# Altium PCB drive.PcbDoc
Units mil, origin at the board's own origin, x right, y up, seen from the top; angles counter-clockwise.
Board outline 2180 x 2690 mil, 2 copper layers (Top Layer, Bottom Layer); 20 components, 12 nets, 60 pads, 2 vias.
Unrouted connection lines stored in the file: 10.
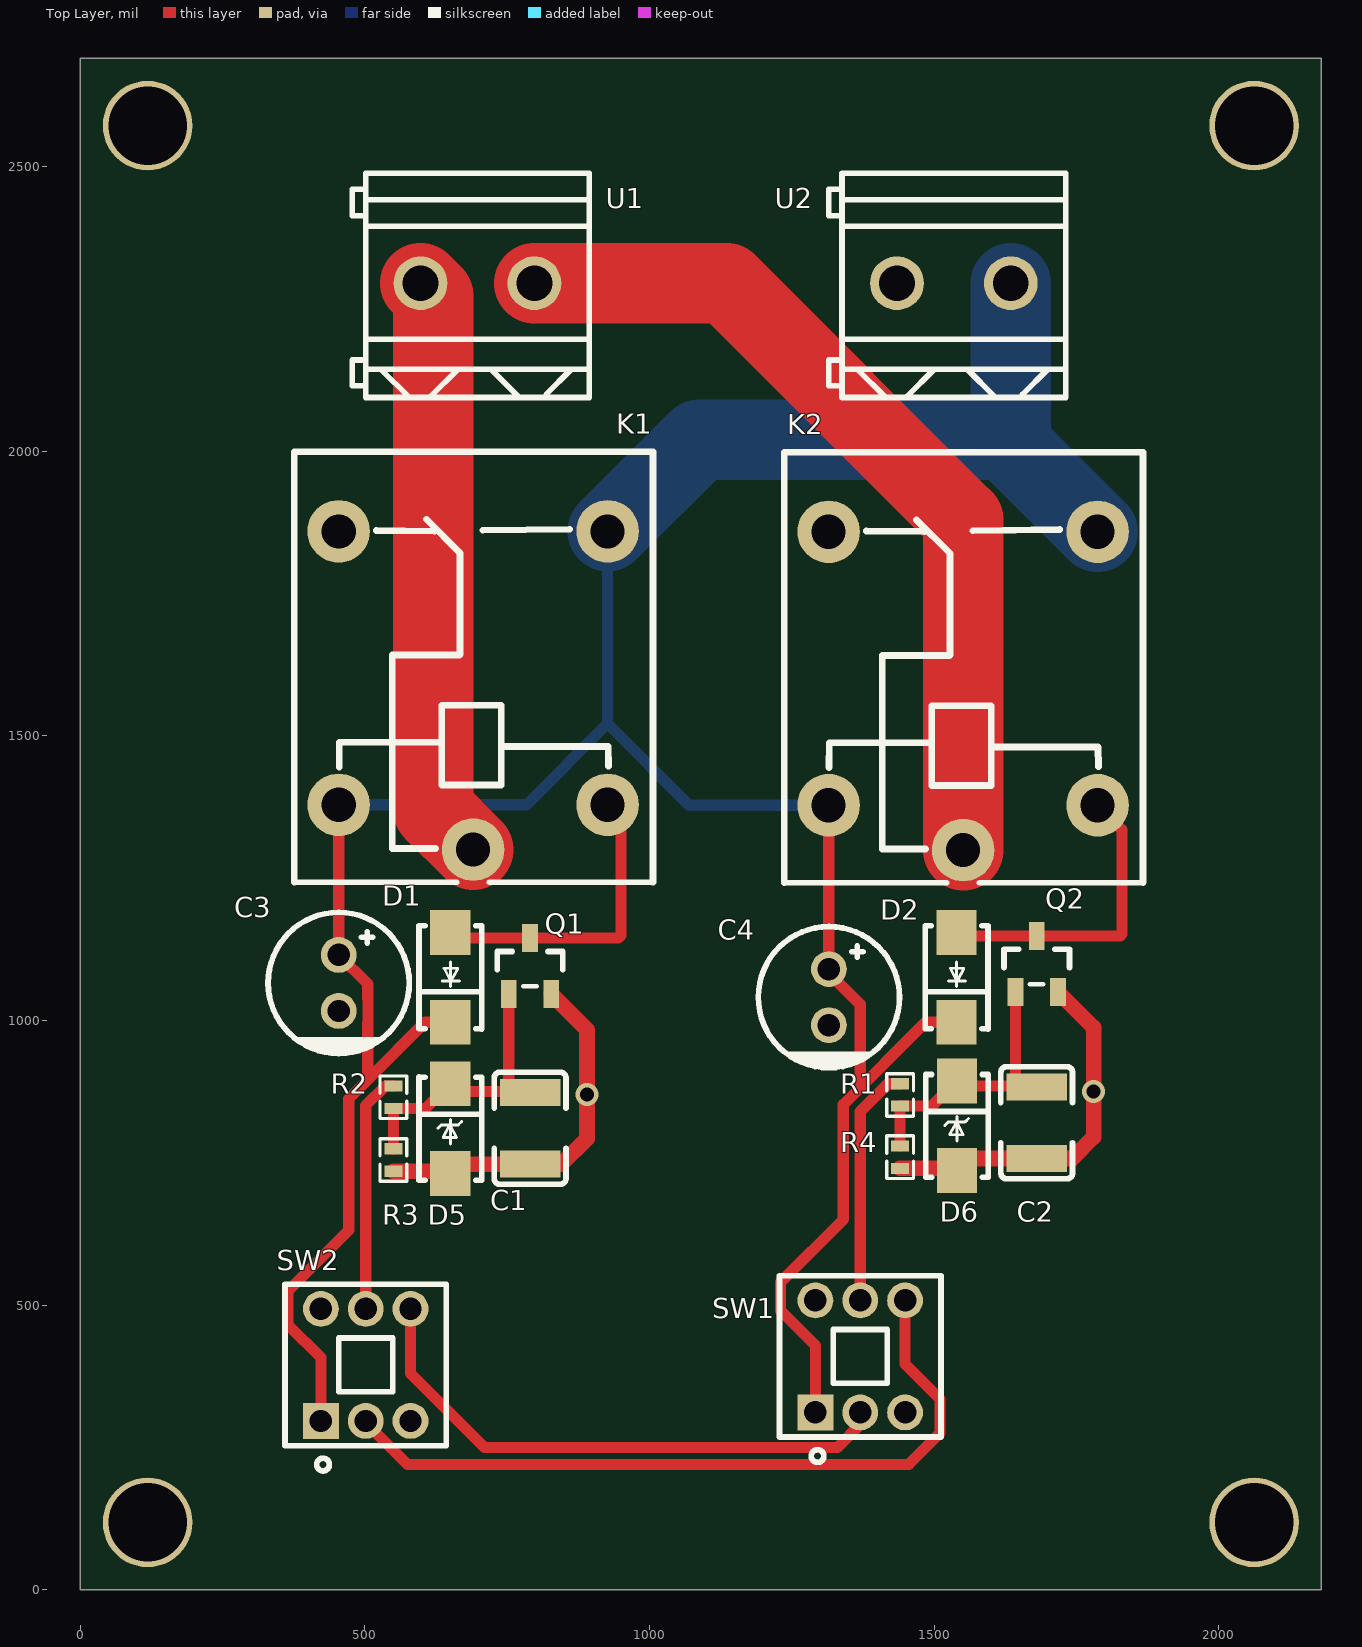
[diagram p0: Top Layer view]
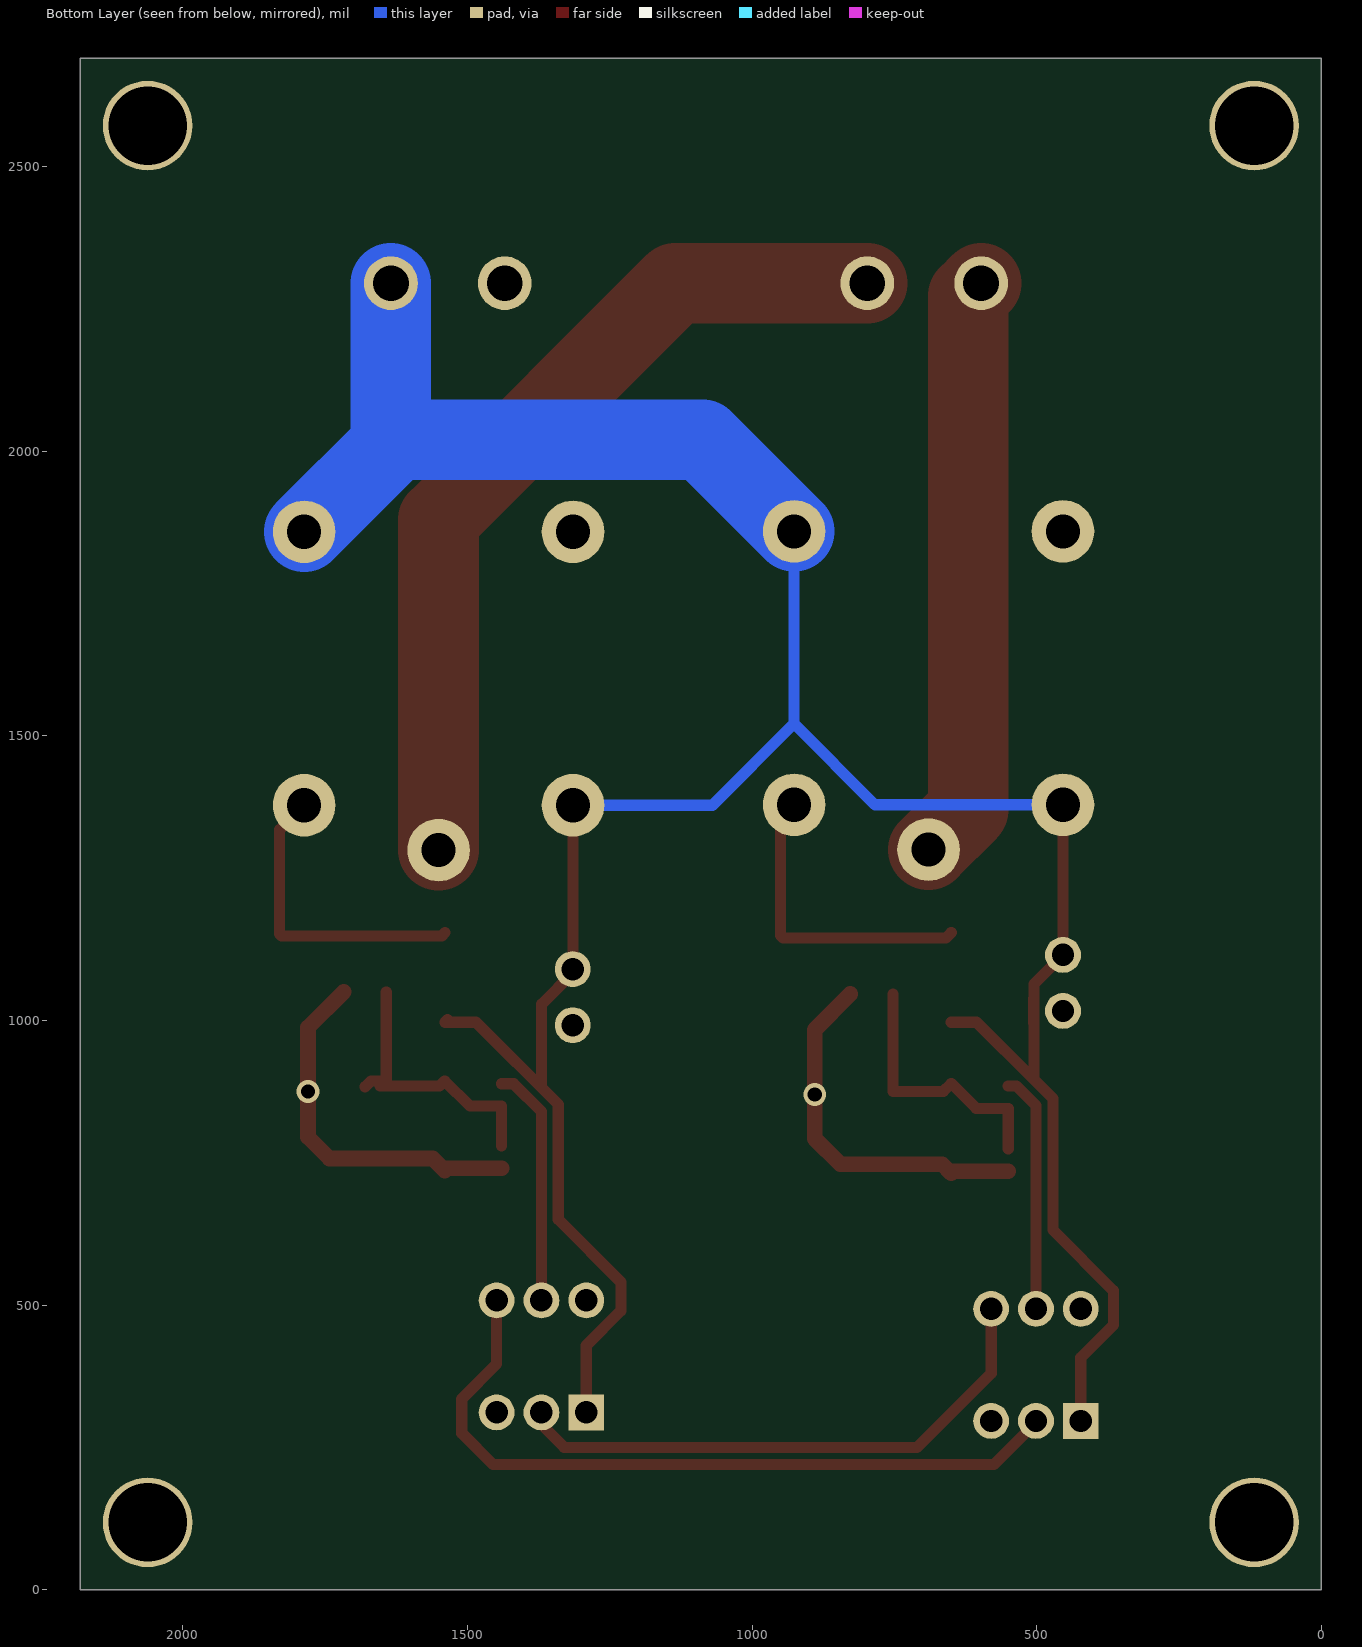
[diagram p1: Bottom Layer view, seen from below]
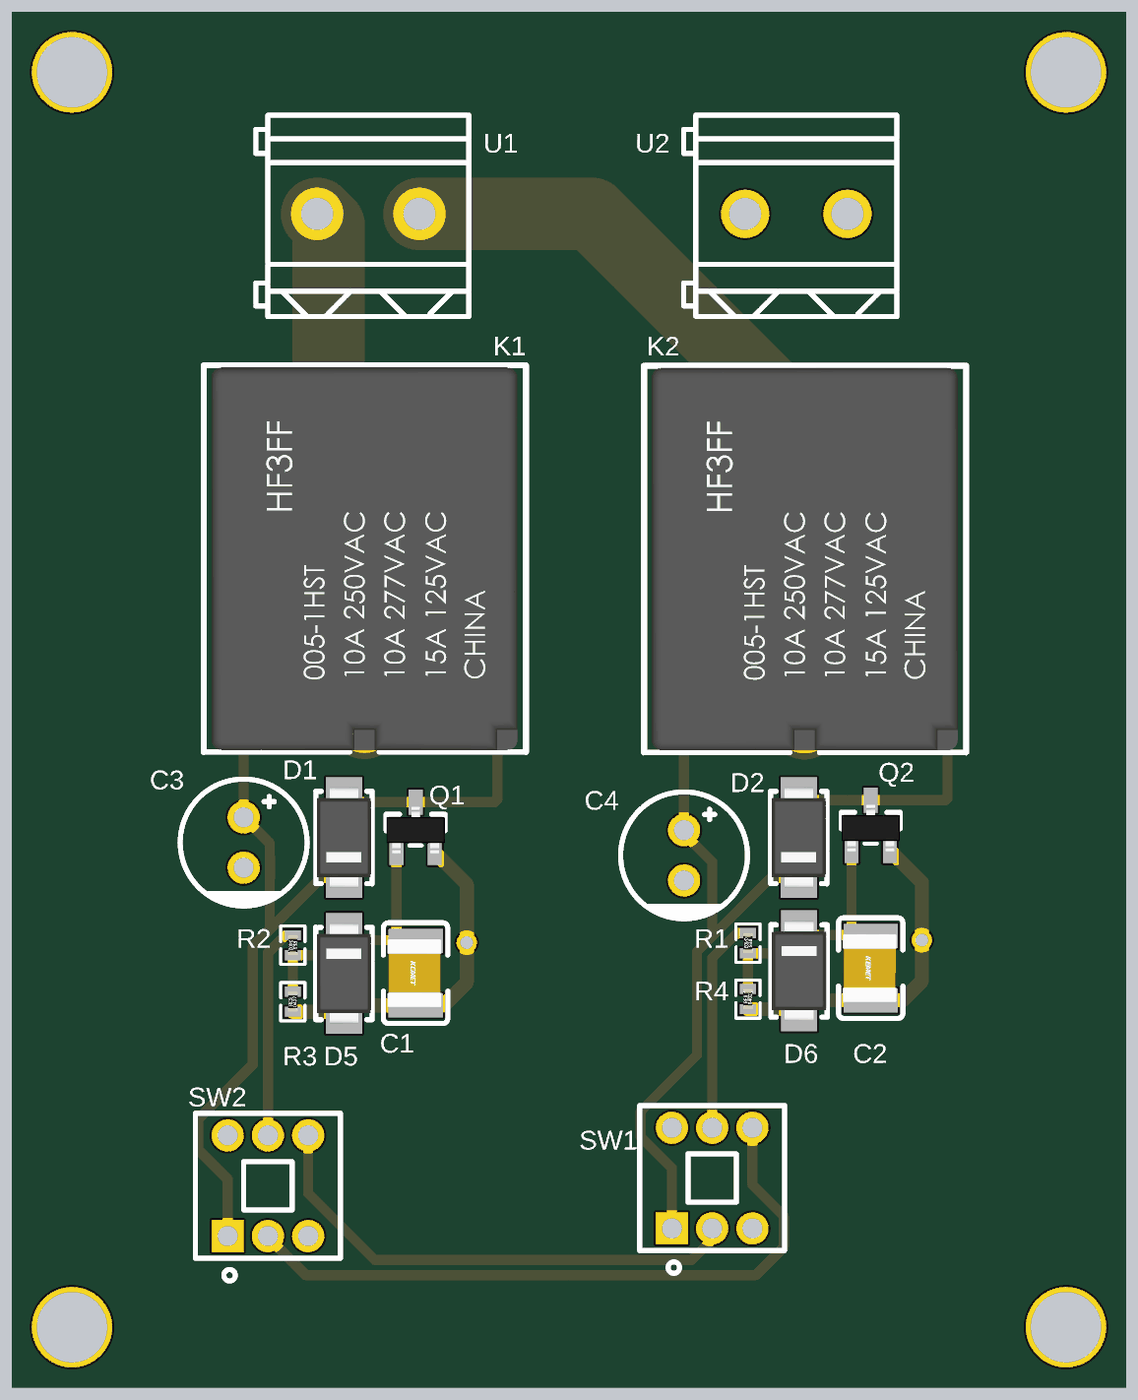
[diagram p2: 3D render of the assembled board from above, using the file's embedded part models]

## Layer stack, top to bottom
Top Solder: solder mask 0.4, Solder Resist, Dk 3.5
Top Layer: signal copper 1.4
Dielectric 1: dielectric 12.6, FR-4, Dk 4.8
Bottom Layer: signal copper 1.4
Bottom Solder: solder mask 0.4, Solder Resist, Dk 3.5

## Board outline
0,0 0,2690 2180,2690 2180,0
cut-out: -180,2270

## Design rules (kind name [scope] priority, off if disabled: settings)
Clearance [All] p1: gap=10 ignorepadtopadclearanceinfootprint=TRUE
HoleSize [All] p1: absolutevalues=TRUE maxlimit=393.7 minlimit=1 maxpercent=80.000 minpercent=20.000
MinimumSolderMaskSliver [All] p1: minsoldermaskwidth=6
PolygonConnect [All] p1: thpad.connectstyle=Direct thpad.reliefconductorwidth=10 thpad.reliefentries=4 thpad.polygonreliefangle="90 Angle" thpad.airgapwidth=10 smdpad.connectstyle=Relief smdpad.reliefconductorwidth=10 smdpad.reliefentries=4 smdpad.polygonreliefangle="90 Angle" smdpad.airgapwidth=10 via.connectstyle=Direct via.reliefconductorwidth=10 via.reliefentries=4 via.polygonreliefangle="90 Angle" via.airgapwidth=10
RoutingVias [All] p1: holewidth=28 width=50 viastyle="Through Hole" minholewidth=10 minwidth=10 maxholewidth=393.7 maxwidth=393.7
SilkToSilkClearance [All] p1: silktosilkclearance=6
SilkToSolderMaskClearance [IsPad] p1: minsilkscreentomaskgap=4 clearancetoexposedcopper=TRUE
SolderMaskExpansion [All] p1: expansion=4
Width VCC [InNet('RELAY1')] p1: maxlimit=400 minlimit=10 preferedwidth=19.68
Width GND [InNet('GND')] p2: maxlimit=400 minlimit=10 preferedwidth=27.56
Width [All] p3: maxlimit=400 minlimit=10 preferedwidth=19.68
26 further rules are at their usual default settings.

## Components (designator, comment, footprint, x,y, rotation, side; value= is the part's Value field where it differs from the comment)
C1 "10uf" C1210 790,810.5 r270 top
C2 "10uf" C1210 1680,820.26 r270 top
C3 "100uf 35v" "100uf 35v" 453.8,1065.79 r270 top
C4 "100uf 35v" "100uf 35v" 1315,1040.79 r270 top
D1 "1N4007" SMA_L4.4-W2.6-LS5.0-RD 650,1075.5 r90 top
D2 "1N4007" SMA_L4.4-W2.6-LS5.0-RD 1539.23,1075.5 r90 top
D5 "SMAJ30A-TP" SMAJ16A-TP 650,810 r270 top
D6 "SMAJ30A-TP" SMAJ16A-TP 1540,815 r270 top
K1 "JQC-3FF/12VDC-1ZS(551)" RELAY-TH_HF3FF/XX-1ZXX(XXX) 514.26,1620.8 r90 top
K2 "JQC-3FF/12VDC-1ZS(551)" RELAY-TH_HF3FF/XX-1ZXX(XXX) 1375,1620 r90 top
Q1 "FHT9014Y-ME" SOT-23-3_L2.9-W1.3-P1.90-LS2.4-BR 790,1095.5 r270 top
Q2 "FHT9014Y-ME" SOT-23-3_L2.9-W1.3-P1.90-LS2.4-BR 1680,1099.26 r270 top
R1 "2.2k" R0402 1440,869.06 r270 top
R2 "2.2k" R0402 550,865 r270 top
R3 "1k" R0402 550,754.68 r90 top
R4 "1k" R0402 1440,759.68 r90 top
SW1 "XKB7070-W" SW-TH_6P-L7.2-W7.2-P2.00-LS5.0 1370,390 r0 top
SW2 "XKB7070-W" SW-TH_6P-L7.2-W7.2-P2.00-LS5.0 501.26,375 r0 top
U1 "DB128L-5.08-2P" CONN-TH_2P-P5.08_DB128L-5.08-2P 690,2295 r0 top
U2 "DB128L-5.08-2P" CONN-TH_2P-P5.08_DB128L-5.08-2P 1526.9,2295 r0 top

## Footprints (in the part's own frame and the unit in brackets; to place one, negate y for a bottom-side part, rotate by r counter-clockwise, add the part's x,y. Pads: shape width x height; smd on the part's side, far side on the other; paste and mask are expansions set on the pad)
"100uf 35v" [mm]
  round 1.6 hole 1: 1(-1.25,0) 2(1.25,0)
  silkscreen extent -3.15,-3.15 3.15,3.15
C1210 [mm]
  rect 1.2x2.7 smd: 1(-1.6,0) 2(1.6,0)
  silkscreen extent -2.5,-1.6 2.5,1.6, body extent -1.7,-1.4 1.7,1.3, height 1.4
CONN-TH_2P-P5.08_DB128L-5.08-2P [mm]
  round 2.4 hole 1.6: 1(-2.347,0) 2(2.733,0)
  silkscreen extent -5.4,-5.1 5.18,4.9
R0402 [mm]
  rect 0.5x0.8 smd: 1(-0.5,0) 2(0.5,0)
  silkscreen extent -0.95,-0.6 0.95,0.6, body extent -0.5,-0.25 0.5,0.25, height 0.35
RELAY-TH_HF3FF/XX-1ZXX(XXX) [mil]
  round 110 hole 60: 1(-242.1,60.46) 2(-242.1,-411.94) 3(238.3,-411.94) 4(-320.8,-175.74) 5(238.3,60.46)
  silkscreen extent -378,-492 378,138, body extent -374,-475 374,123, height 611
SMA_L4.4-W2.6-LS5.0-RD [mm]
  rect 2x1.8 smd: 1(-2,0) 2(2,0)
  silkscreen extent -2.3,-1.4 2.3,1.4, body extent -2.5,-1.35 2.5,1.35, height 2.27
SMAJ16A-TP [mm]
  rect 2x1.8 smd: 1(-2,0) 2(2,0)
  silkscreen extent -2.3,-1.4 2.3,1.4, body extent -2.5,-1.35 2.5,1.35, height 2.27
SOT-23-3_L2.9-W1.3-P1.90-LS2.4-BR [mm]
  rect 1.25x0.7 smd: 1(1.25,-0.95) 2(1.25,0.95) 3(-1.25,0)
  silkscreen extent -0.65,-1.46 0.9,1.46, body extent -1.4,-1.45 1.28,1.45, height 1.35
SW-TH_6P-L7.2-W7.2-P2.00-LS5.0 [mm]
  rect 1.6x1.6 hole 1: 1(-2,-1.999)
  round 1.6 hole 1: 2(0,-1.999) 3(2,-1.999) 4(-2,3.001) 5(0,3.001) 6(2,3.001)
  silkscreen extent -3.6,-4.23 3.6,4.1

## Part data
C1 C2: library part EMK325ABJ107MM-P
D5 D6: library part SMAJ16A-TP
R1 R2 R3 R4: library part MFR0S2F1001A20

## Free pads (board coordinates)
  round 157.48 hole 137.8: 2(118.11,118.11) 2(118.11,2571.89) 2(2061.89,118.11) 2(2061.89,2571.89)

## Via types
v1: diameter 40, hole 25, Top Layer to Bottom Layer, 2 vias

## Nets (pads, with @x,y where several pads share a name; then routed paths per layer and width w, separated by ;. In a path a pad name is that pad's centre, name@x,y a point inside that pad or via, vN(x,y) a via of type N, cw(c..) or ccw(c..) an arc to the next point about the centre after c; other vN are vias at no path point)
GND: C1.2 C2.2 C3.2 C4.2 D5.2 D6.2 K1.5 K2.5 pad.2 Q1.2 Q2.2 R3.1 R4.1 U2.1 | length 1293.7
  Top Layer w27.56: R3.1 646.26,735 D5.2 666.25,747.51 845.24,747.51 890,792.27 v1(890,870) 890,983.7 Q1.2 ; R4.1 1536.26,740 D6.2 1561.01,757.27 1742.27,757.27 1780,795 v1(1780,875) 1780,987.46 Q2.2
MOTOR1: K1.4 U1.1 | length 1033.3
  Top Layer w141.73: U1.1 620,2272.58 620,1370 K1.4
MOTOR2: K2.4 U1.2 | length 1505.4
  Top Layer w141.73: U1.2 1135,2295 1550.74,1879.26 K2.4
NetR1_1: R1.1 SW1.5 | length 422
  Top Layer w19.68: SW1.5 1370,840 1418.74,888.74 R1.1
NetR2_1: R2.1 SW2.5 | length 420.1
  Top Layer w19.68: SW2.5 501.26,850.23 535.71,884.69 R2.1
NetSW1_2: SW1.2 SW2.6 | length 995.2
  Top Layer w19.68: SW2.6 580,379.99 710.3,249.68 1329.83,249.68 1370,289.85 SW1.2
NetSW1_6: SW1.6 SW2.2 | length 1323.3
  Top Layer w19.68: SW2.2 501.26,293.74 575,220 1455.15,220 1510,274.85 1510,335 1448.74,396.26 SW1.6
OUT1: C1.1 D5.1 Q1.1 R2.2 R3.2 | length 468.9
  Top Layer w19.68: R3.2 R2.2 606.08,845.32 650,889.24 664.24,875 752.6,875 Q1.1
OUT2: C2.1 D6.1 Q2.1 R1.2 R4.2 | length 515.1
  Top Layer w19.68: R4.2 R1.2 1495.63,849.37 D6.1 1548.87,884.87 1653.87,884.87 C2.1@1645,893.74 ; Q2.1 1642.6,896.14 C2.1@1645,893.74 ; C2.1 1669.51,893.74 C2.1@1645,893.74
RELAY1: C3.1 C4.1 D1.1 D2.1 K1.1 K1.3 K2.1 K2.3 SW1.1 SW2.1 U2.2 | length 5385.2
  Top Layer w19.68: SW2.1 422.52,407.48 365,465 365,525 471.57,631.57 471.57,862.53 505,895.95 ; K1.1@459.76,1372.74 K1.1 C3.1 505,1063.8 505,1037.98 505.14,1037.84 505.14,995.31 505,995.17 505,895.95 ; D1.1 605.81,996.76 505,895.95 ; SW1.1 1291.26,428.74 1230,490 1230,540 1340.31,650.31 1340.31,852.29 1484.78,996.76 D2.1 D2.1@1534.87,1001.12 ; K2.1@1325,1367.44 K2.1 1314.54,1083.69 1370,1028.22 1370,883.75
  Bottom Layer w19.68: K1.1 783.7,1378.7 926.2,1521.2 ; K1.3 926.2,1521.2 ; K2.1 1069.5,1377.9 926.2,1521.2
  Bottom Layer w141.73: K1.3 1087.1,2020 1625.24,2020 1634.48,2010.76 ; U2.2 1634.48,2010.76 ; K2.3 1634.48,2010.76
RELAY2: D1.2 K1.2 Q1.3 | length 545.2
  Top Layer w19.68: D1.2 659.54,1144.7 Q1.3 945.46,1144.7 950,1149.24 950,1354.9 K1.2
RELAY4: D2.2 K2.2 Q2.3 | length 538.5
  Top Layer w19.68: D2.2 1545.01,1148.46 Q2.3 1826.72,1148.46 1830,1151.74 1830,1334.84 K2.2
pads on no net: SW1.3 SW1.4 SW2.3 SW2.4

## Polygon pours and split planes (outlines as drawn)
no net on Top Layer "Top Layer-No Net 2" (solid, pour order 8): 0,2690
no net on Top Layer "Top Layer-No Net" (solid, pour order 4): 3040,-105
no net on Top Layer "Top Layer-No Net 1" (solid, pour order 2): 315,1810

## Keep-outs
Top Layer:
  region: 1620,1665

## Silkscreen, mask and mechanical layers (free items; w line width, h text height)
Mechanical 1:
  lines w10: 0,0 2180,0 2180,2690 70,2690 0,2690 0,2620 0,0